# Altium PCB PCB1.PcbDoc
Units mil, origin at the board's own origin, x right, y up, seen from the top; angles counter-clockwise.
Board outline 985 x 2455.29 mil, 2 copper layers (Top Layer, Bottom Layer); 11 components, 8 nets, 39 pads, 0 vias.
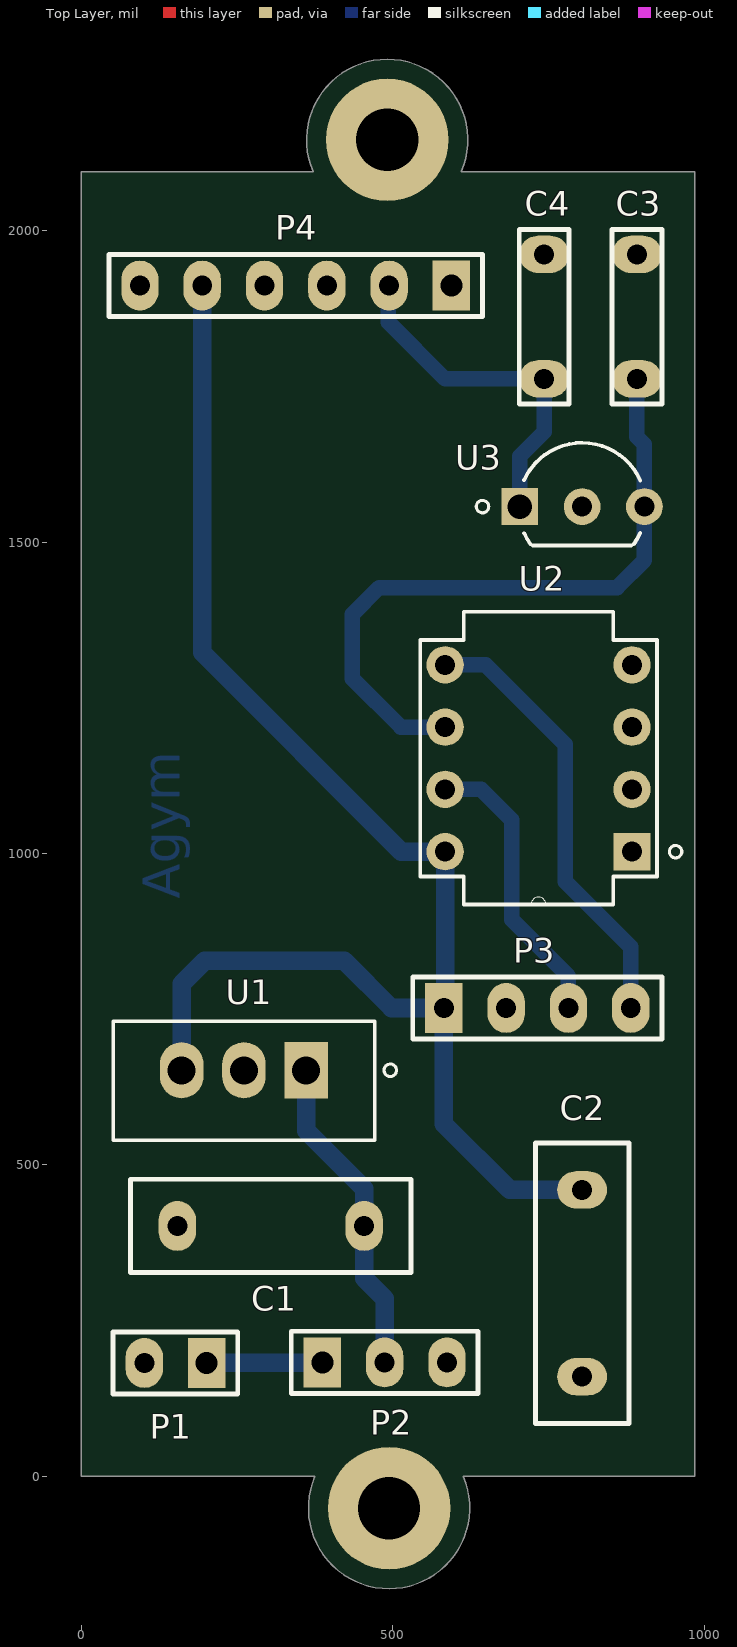
[diagram p0: Top Layer view]
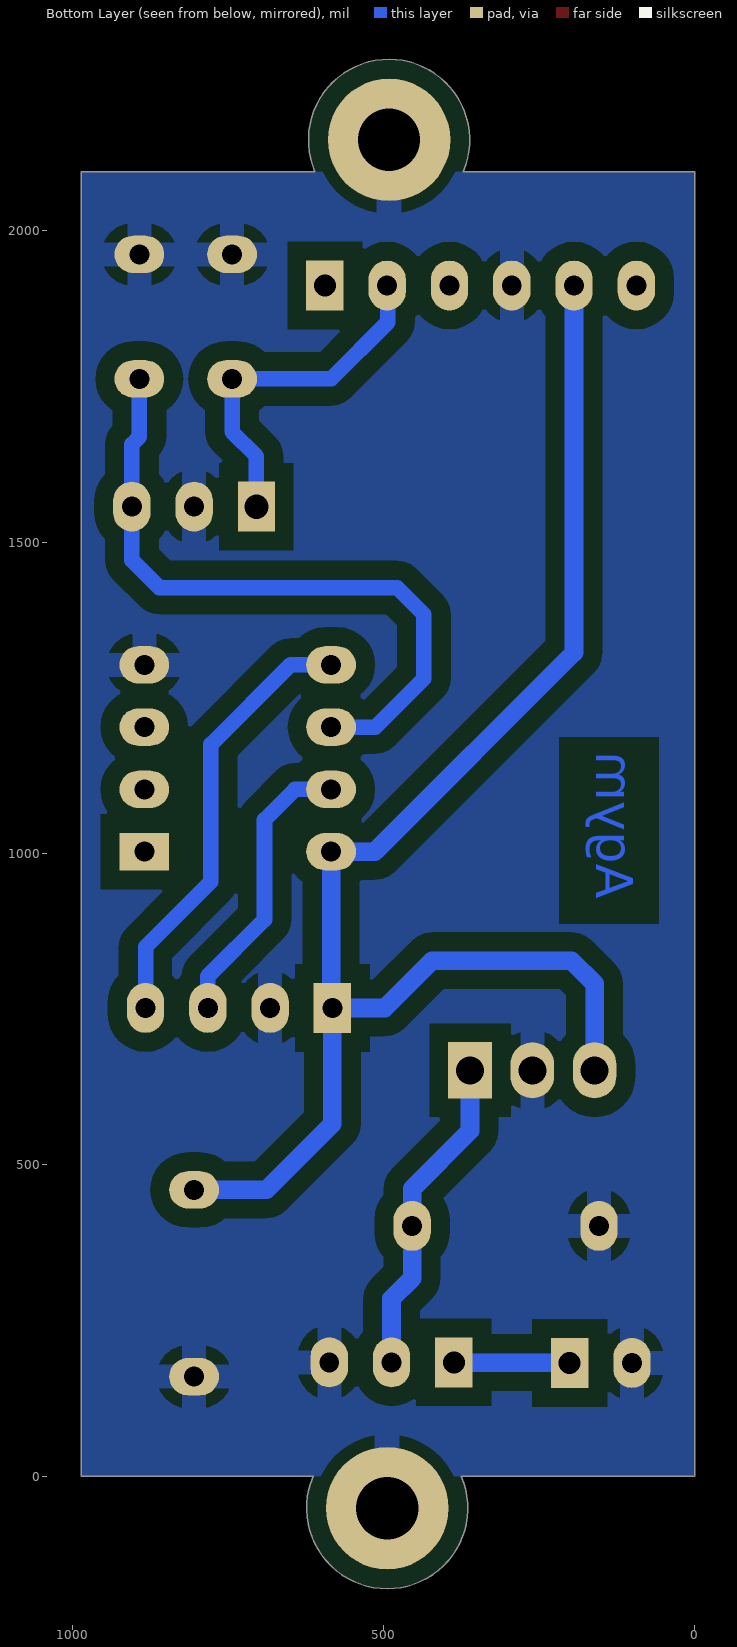
[diagram p1: Bottom Layer view, seen from below]

## Layer stack, top to bottom
Top Solder: solder mask 0.4, Solder Resist, Dk 3.5
Top Layer: signal copper 1.4
Dielectric 1: dielectric 12.6, FR-4, Dk 4.8
Bottom Layer: signal copper 1.4
Bottom Solder: solder mask 0.4, Solder Resist, Dk 3.5

## Board outline
0,0 0,2095 372,2095 cw(c491,2145.81) 610,2095 985,2095 985,0 985,-0.19 613,-0.19 cw(c494,-51) 375,-0.19

## Design rules (kind name [scope] priority, off if disabled: settings)
Clearance Clearance_Poly [InPolygon] p1: gap=30 ignorepadtopadclearanceinfootprint=FALSE
Clearance [All] p2: gap=8 ignorepadtopadclearanceinfootprint=FALSE
PolygonConnect [All] p1: connectstyle=Relief reliefconductorwidth=39.37 reliefentries=4 polygonreliefangle="90 Angle" airgapwidth=20
RoutingLayers [All] p1: top layer_v5=FALSE bottom layer_v5=TRUE
RoutingVias [All] p1: holewidth=40 width=80 viastyle="Through Hole" minholewidth=32 minwidth=64 maxholewidth=48 maxwidth=96
SilkToSolderMaskClearance [IsPad] p1 off: minsilkscreentomaskgap=4 clearancetoexposedcopper=TRUE
SolderMaskExpansion [All] p1: expansion=4
Width Width_Power [InNetClass('PowerNet')] p1: maxlimit=39.37 minlimit=10 preferedwidth=15.75
Width [All] p2: maxlimit=25 minlimit=15 preferedwidth=20
28 further rules are at their usual default settings.

## Classes and differential pairs
net class PowerNet: 5V GND IN TX_3V3 TX_5V VCC
component class Sheet1: C1 C2 C3 P1 P2 P3 P4 U1 U2 U3

## Components (designator, comment, footprint, x,y, rotation, side; value= is the part's Value field where it differs from the comment)
C1 "Cap" RAD-0.3 304,402 r0 top value=330nF
C2 "Cap" RAD-0.3 804,310 r90 top value=100nF
C3 "Capacitor" RAD-0.2 892,1862 r270 top value=100uF
C4 "Capacitor" RAD-0.2 743,1862 r270 top value=100uF
P1 "Battery" HDR1X2 201,182 r180 top
P2 "Switch" HDR1X3 387,183 r0 top
P3 "VL53L0X" HDR1X4 582,752 r0 top
P4 "HC-05" HDR1X6 594,1912 r180 top
U1 "L7805CV" TO-220_STM 361,652 r180 top
U2 "ATTINY85-20PU" 8P3_ATM 884,1003 r180 top
U3 "L78L33ABZ-AP" TO-92-TR_STM 704,1557 r0 top

## Footprints (in the part's own frame and the unit in brackets; to place one, negate y for a bottom-side part, rotate by r counter-clockwise, add the part's x,y. Pads: shape width x height; smd on the part's side, far side on the other; paste and mask are expansions set on the pad)
8P3_ATM [mil]
  rect 60x60 / inner rect 60x60 / far side rect 80x60 hole 32 mask+0: 1(0,0)
  round 60 / inner round 60 / far side oval 80x60 hole 32 mask+0: 2(0,-100) 3(0,-200) 4(0,-300) 5(300,-300) 6(300,-200) 7(300,-100) 8(300,0)
  silkscreen extent -80,-385 340,85, body extent -10,-375 310,75, height 205
HDR1X2 [mil] "Connector; Header; 2 Position"
  rect 60x80 hole 35.43: 1(0,0)
  oval 60x80 hole 32: 2(100,0)
  silkscreen extent -50,-50 150,50
HDR1X3 [mil] "Connector; Header; 3 Position"
  rect 60x80 hole 35.43: 1(0,0)
  oval 60x80 hole 32: 2(100,0) 3(200,0)
  silkscreen extent -50,-50 250,50
HDR1X4 [mil] "Connector; Header; 4 Position"
  rect 60x80 hole 32: 1(0,0)
  oval 60x80 hole 32: 2(100,0) 3(200,0) 4(300,0)
  silkscreen extent -50,-50 350,50
HDR1X6 [mil] "Connector; Header; 6 Position"
  rect 60x80 hole 35.43: 1(0,0)
  oval 60x80 hole 32: 2(100,0) 3(200,0) 4(300,0) 5(400,0) 6(500,0)
  silkscreen extent -50,-50 550,50
RAD-0.2 [mil]
  oval 60x80 hole 32: 1(-100,0) 2(100,0)
  silkscreen extent -140,-40 140,40, body extent -138,-33 138,33, height 288
RAD-0.3 [mil] "Radial Cap, Thru-Hole; 2 Leads; 0.3 in Pin Spacing"
  oval 60x80 hole 32: 1(-150,0) 2(150,0)
  silkscreen extent -225,-75 225,75
TO-92-TR_STM [mil]
  rect 59x59 / inner rect 59x59 / far side rect 59x80 hole 39 mask+0: 1(0,0)
  round 59 / inner round 59 / far side oval 60x80 hole 32 mask+0: 2(100,0) 3(200,0)
  silkscreen extent -70,-63 193,102, body extent -14,-37 214,98, height 115
TO-220_STM [mil]
  rect 70x90 hole 45: 1(0,0)
  oval 70x90 hole 45: 2(100,0) 3(200,0)
  silkscreen extent -145,-79 310,113, body extent -105,-73 305,108, height 776

## Part data
C1 C2: "Capacitor", LatestRevisionDate=17-Jul-2002, LatestRevisionNote="Re-released for DXP Platform.", PackageDescription="Radial Cap, Thru-Hole; 2 Leads; 0.3 in Pin Spacing", PackageReference=RAD-0.3, Published=8-Jun-2000, Publisher="Altium Limited"
C3 C4: library part C
P1: library part "Header 2", "Header, 2-Pin", LatestRevisionDate=17-Jul-2002, LatestRevisionNote="Re-released for DXP Platform.", Publisher="Altium Limited"
P2: library part "Header 3", "Header, 3-Pin", LatestRevisionDate=17-Jul-2002, LatestRevisionNote="Re-released for DXP Platform.", Publisher="Altium Limited"
P3: library part "Header 4", "Header, 4-Pin", LatestRevisionDate=17-Jul-2002, LatestRevisionNote="Re-released for DXP Platform.", Publisher="Altium Limited"
P4: library part "Header 6", "Header, 6-Pin", LatestRevisionDate=17-Jul-2002, LatestRevisionNote="Re-released for DXP Platform.", Publisher="Altium Limited"
U1 U3: "No Description Available", Mfr_Name=STMicroelectronics, Copyright="Copyright (C) 2021 Ultra Librarian. All rights reserved.", RefDes=RefDes, Type=DEV
  U1: Manufacturer_Part_Number=L7805CV
  U3: Manufacturer_Part_Number=L78L33ABZ-AP
U2: "No Description Available", Mfr_Name=Microchip, Copyright="Copyright (C) 2021 Ultra Librarian. All rights reserved.", Manufacturer_Part_Number=ATTINY85-20PU, RefDes=RefDes, Type=DEV

## Free pads (board coordinates)
  round 196.85 hole 100: 2(491,2145.81) 2(494,-51)

## Nets (pads, with @x,y where several pads share a name; then routed paths per layer and width w, separated by ;. In a path a pad name is that pad's centre, name@x,y a point inside that pad or via, vN(x,y) a via of type N, cw(c..) or ccw(c..) an arc to the next point about the centre after c; other vN are vias at no path point)
5V: C2.2 P3.1 P4.5 U1.3 U2.8 | length 2423.3
  Bottom Layer w15.75: P3.1 P3.1@584,754
  Bottom Layer w20: P3.1 P3.1@583,752
  Bottom Layer w30: U1.3 161,791 198,828 422,828 498,752 P3.1 582,565.81 687.81,460 C2.2 ; P4.5 194,1322.81 513.81,1003 U2.8 P3.1@584,754
GND: C1.1 C2.1 C3.1 C4.1 P1.2 P2.3 P3.2 P4.4 pad.2 U1.2 U2.4 U3.2
IN: C1.2 P2.2 U1.1 | length 521.2
  Bottom Layer w30: U1.1 361,555 454,462 C1.2 454,318 487,285 P2.2
SCL: P3.3 U2.7 | length 467
  Bottom Layer w25: U2.7 642,1103 691,1054 691,894 782,803 P3.3
SDA: P3.4 U2.5 | length 712.5
  Bottom Layer w25: U2.5 649,1303 777,1175 777,955 882,850 P3.4
TX_3V3: C4.2 P4.2 U3.1 | length 567.7
  Bottom Layer w20: P4.2@493,1911 P4.2
  Bottom Layer w25: P4.2@493,1911 493,1853 584,1762 C4.2@742.47,1762 ; U3.1 704,1638 743,1677 C4.2
TX_5V: C3.2 U2.6 U3.3 | length 1085.3
  Bottom Layer w25: U2.6 513,1203 435,1281 435,1384 478,1427 860,1427 904,1471 U3.3 904,1657 892,1669 C3.2
VCC: P1.1 P2.1 | length 186.4
  Bottom Layer w30: P1.1@201.5,182.5 P2.1@386.5,182.5
  Bottom Layer w39.37: P1.1 P1.1@201.5,182.5 ; P2.1@386.5,182.5 P2.1
pads on no net: P4.1 P4.3 P4.6 U2.1 U2.2 U2.3

## Polygon pours and split planes (outlines as drawn)
GND on Bottom Layer "Bottom Layer-GND" (solid, pour order 17): 0,2095 985,2095 985,0 0.19,0 0,-0.19
no net on Bottom Layer "Bottom Layer-No Net 2" (solid, pour order 14): 6,2087
no net on Bottom Layer "Bottom Layer-No Net" (solid, pour order 12): 694,2320.81
no net on Bottom Layer "Bottom Layer-No Net 1" (solid, pour order 8): 444,2221.81

## Other copper
Bottom Layer:
  text "Agym" at 158,927 h60 r90

## Silkscreen, mask and mechanical layers (free items; w line width, h text height)
Mechanical 1:
  lines w10: 0,-0.19 375,-0.19 ccw(c494,-51) 613,-0.19 985,-0.19 ; 0,0 0,2095 372,2095 cw(c491,2145.81) 610,2095 985,2095 985,0